# Altium PCB comm-rfb(1).PcbDoc
Units mm, origin at the board's own origin, x right, y up, seen from the top; angles counter-clockwise.
Board outline 90.17 x 95.88 mm, 4 copper layers (F.Cu, In1.Cu, In2.Cu, B.Cu); 61 components, 214 nets, 404 pads, 150 vias.
Unrouted connection lines stored in the file: 5.
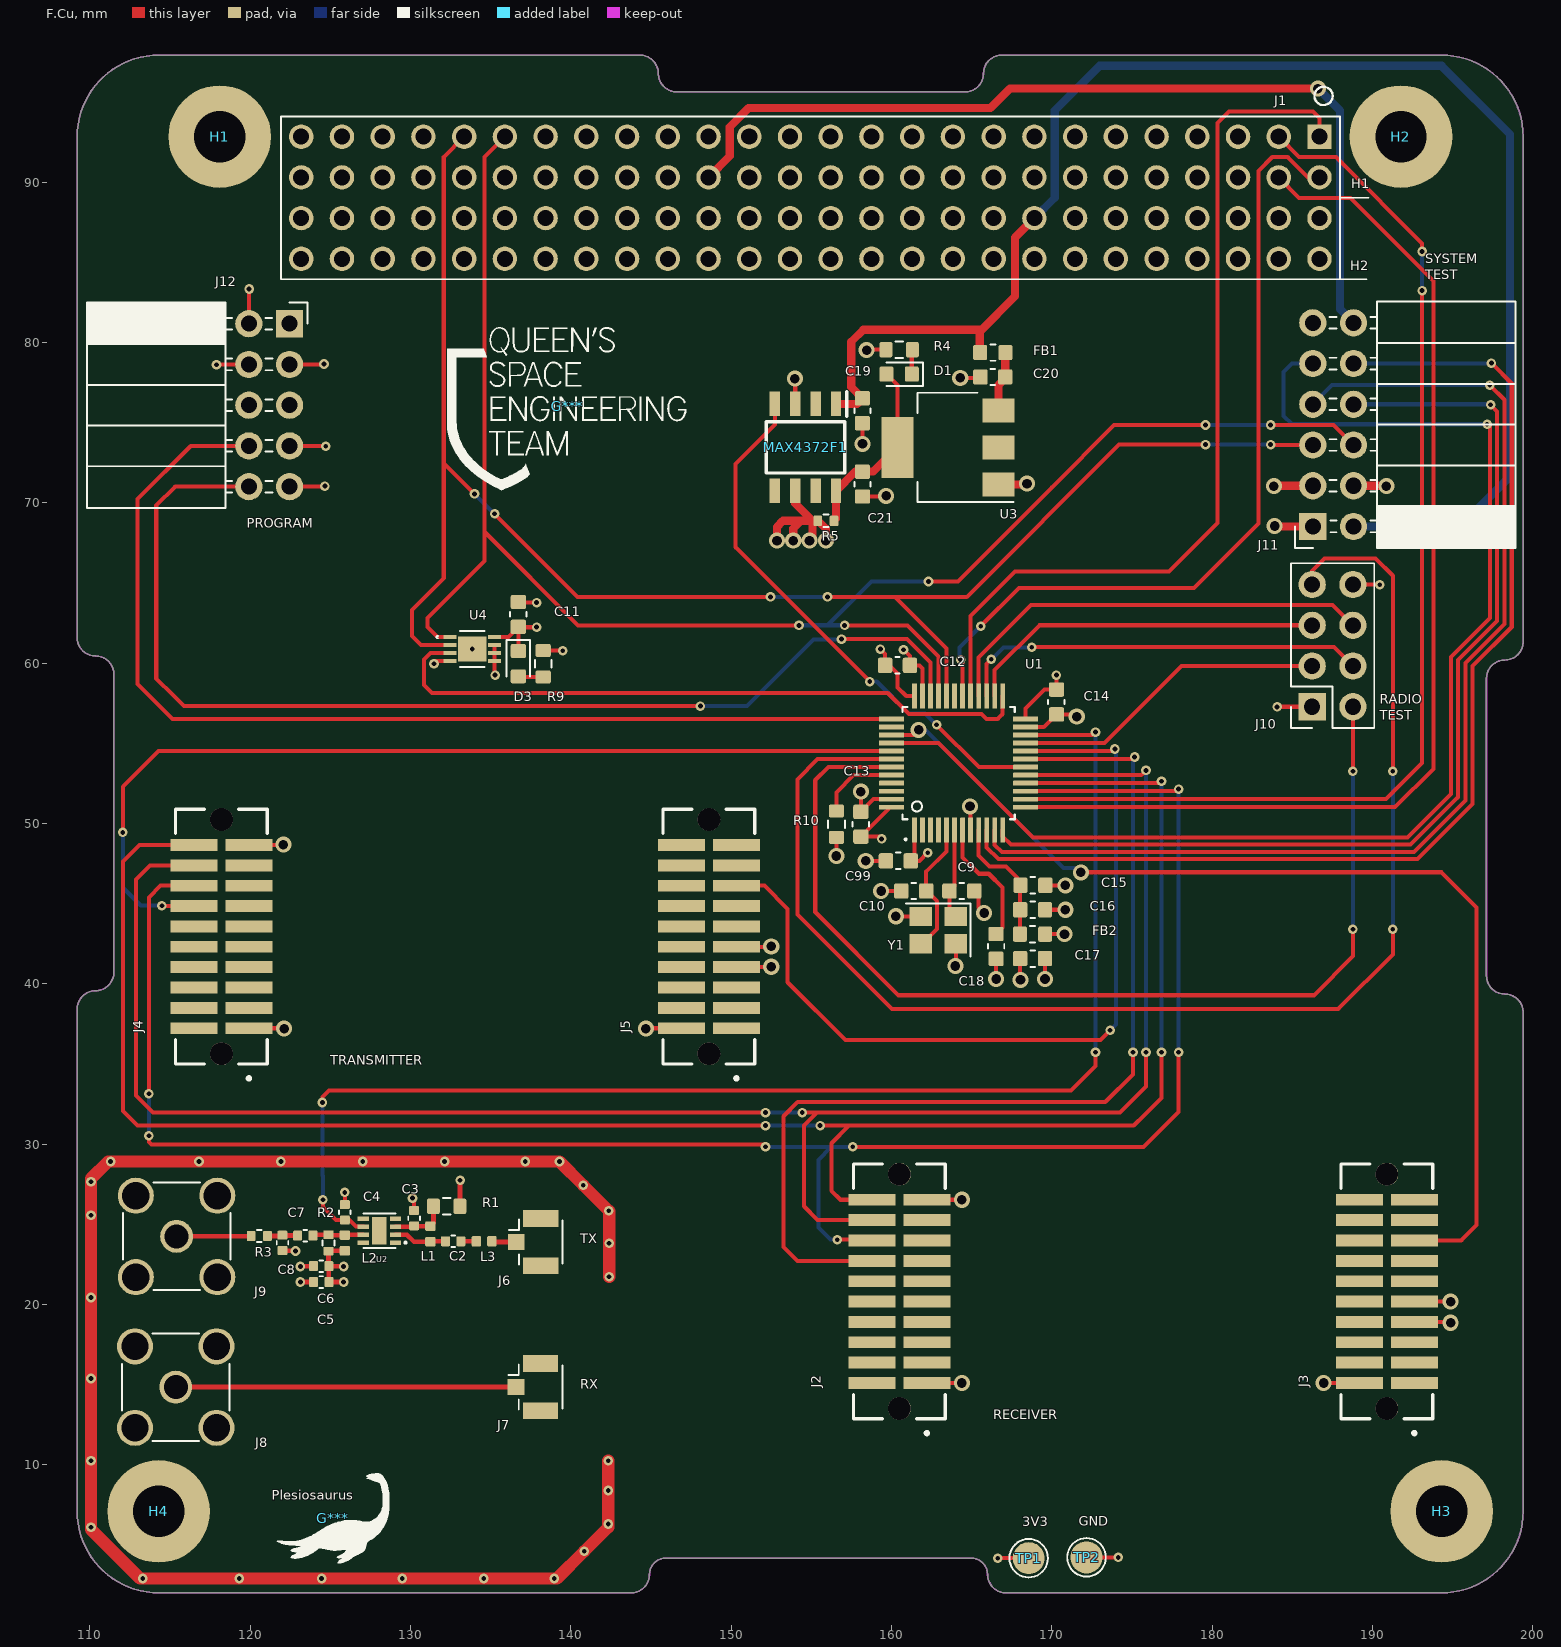
[diagram p0: F.Cu view]
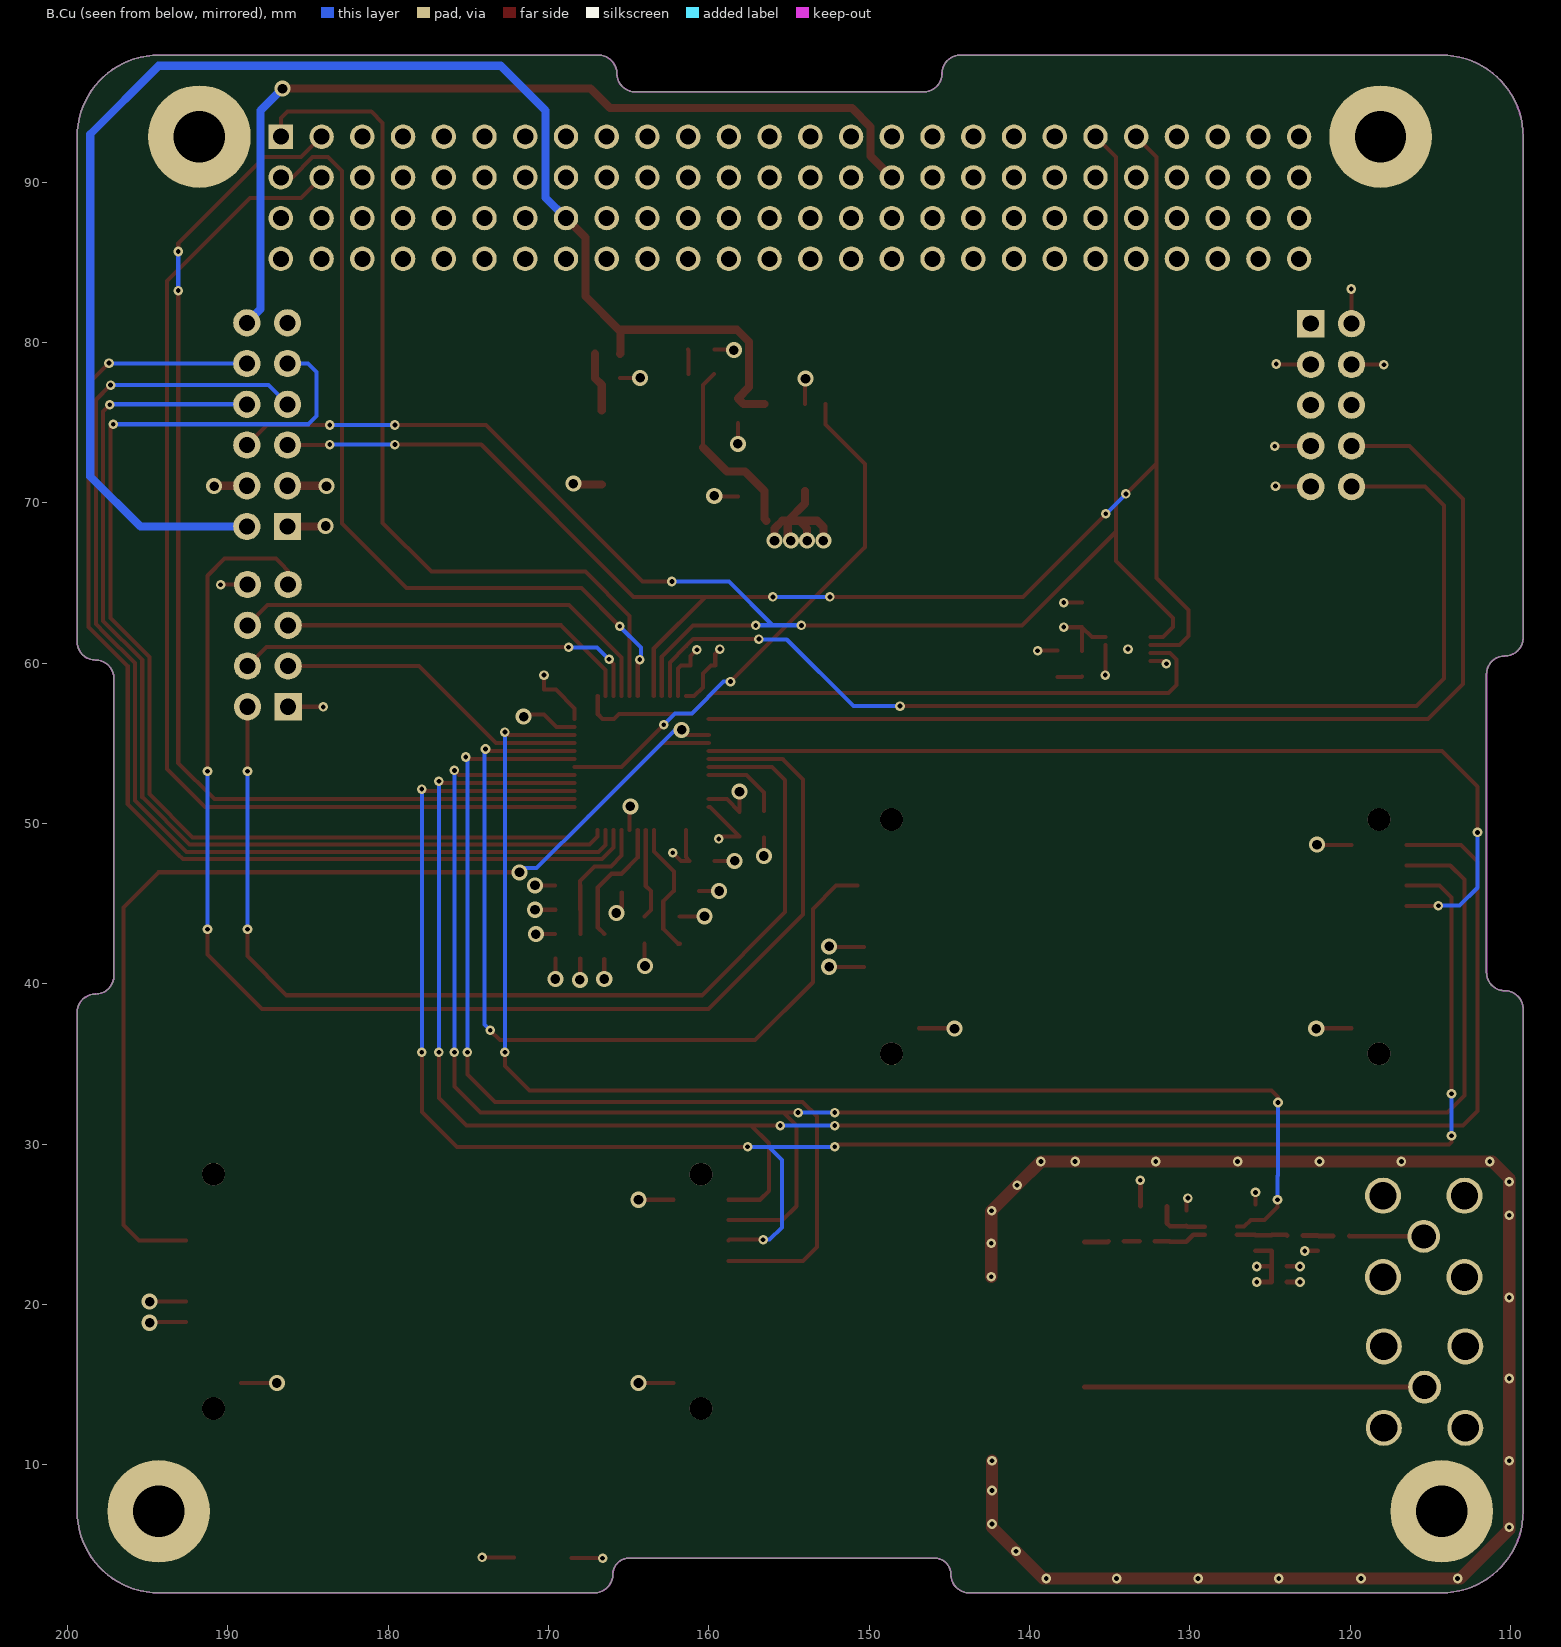
[diagram p1: B.Cu view, seen from below]
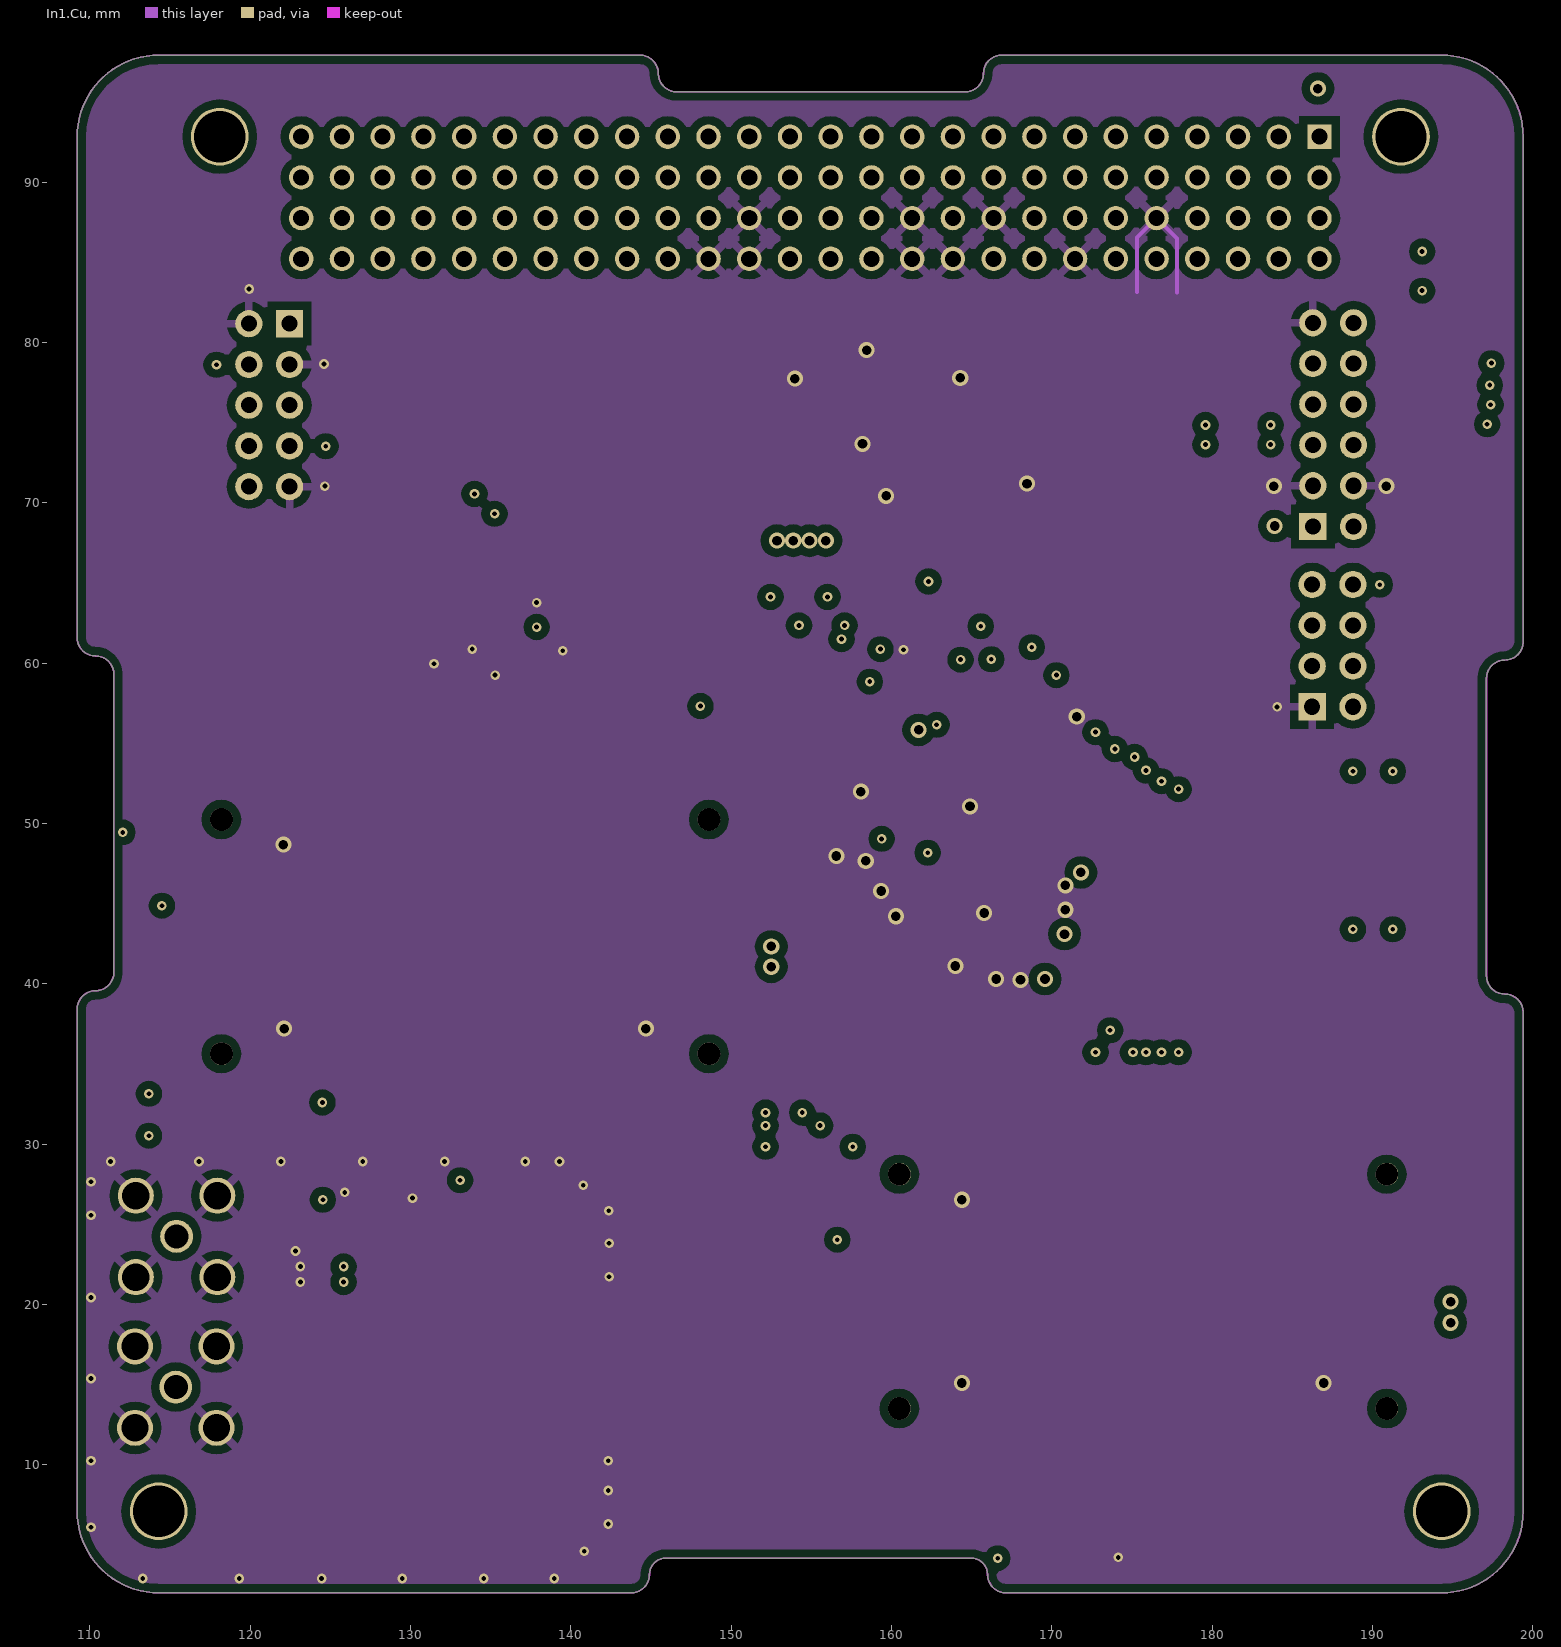
[diagram p2: In1.Cu]
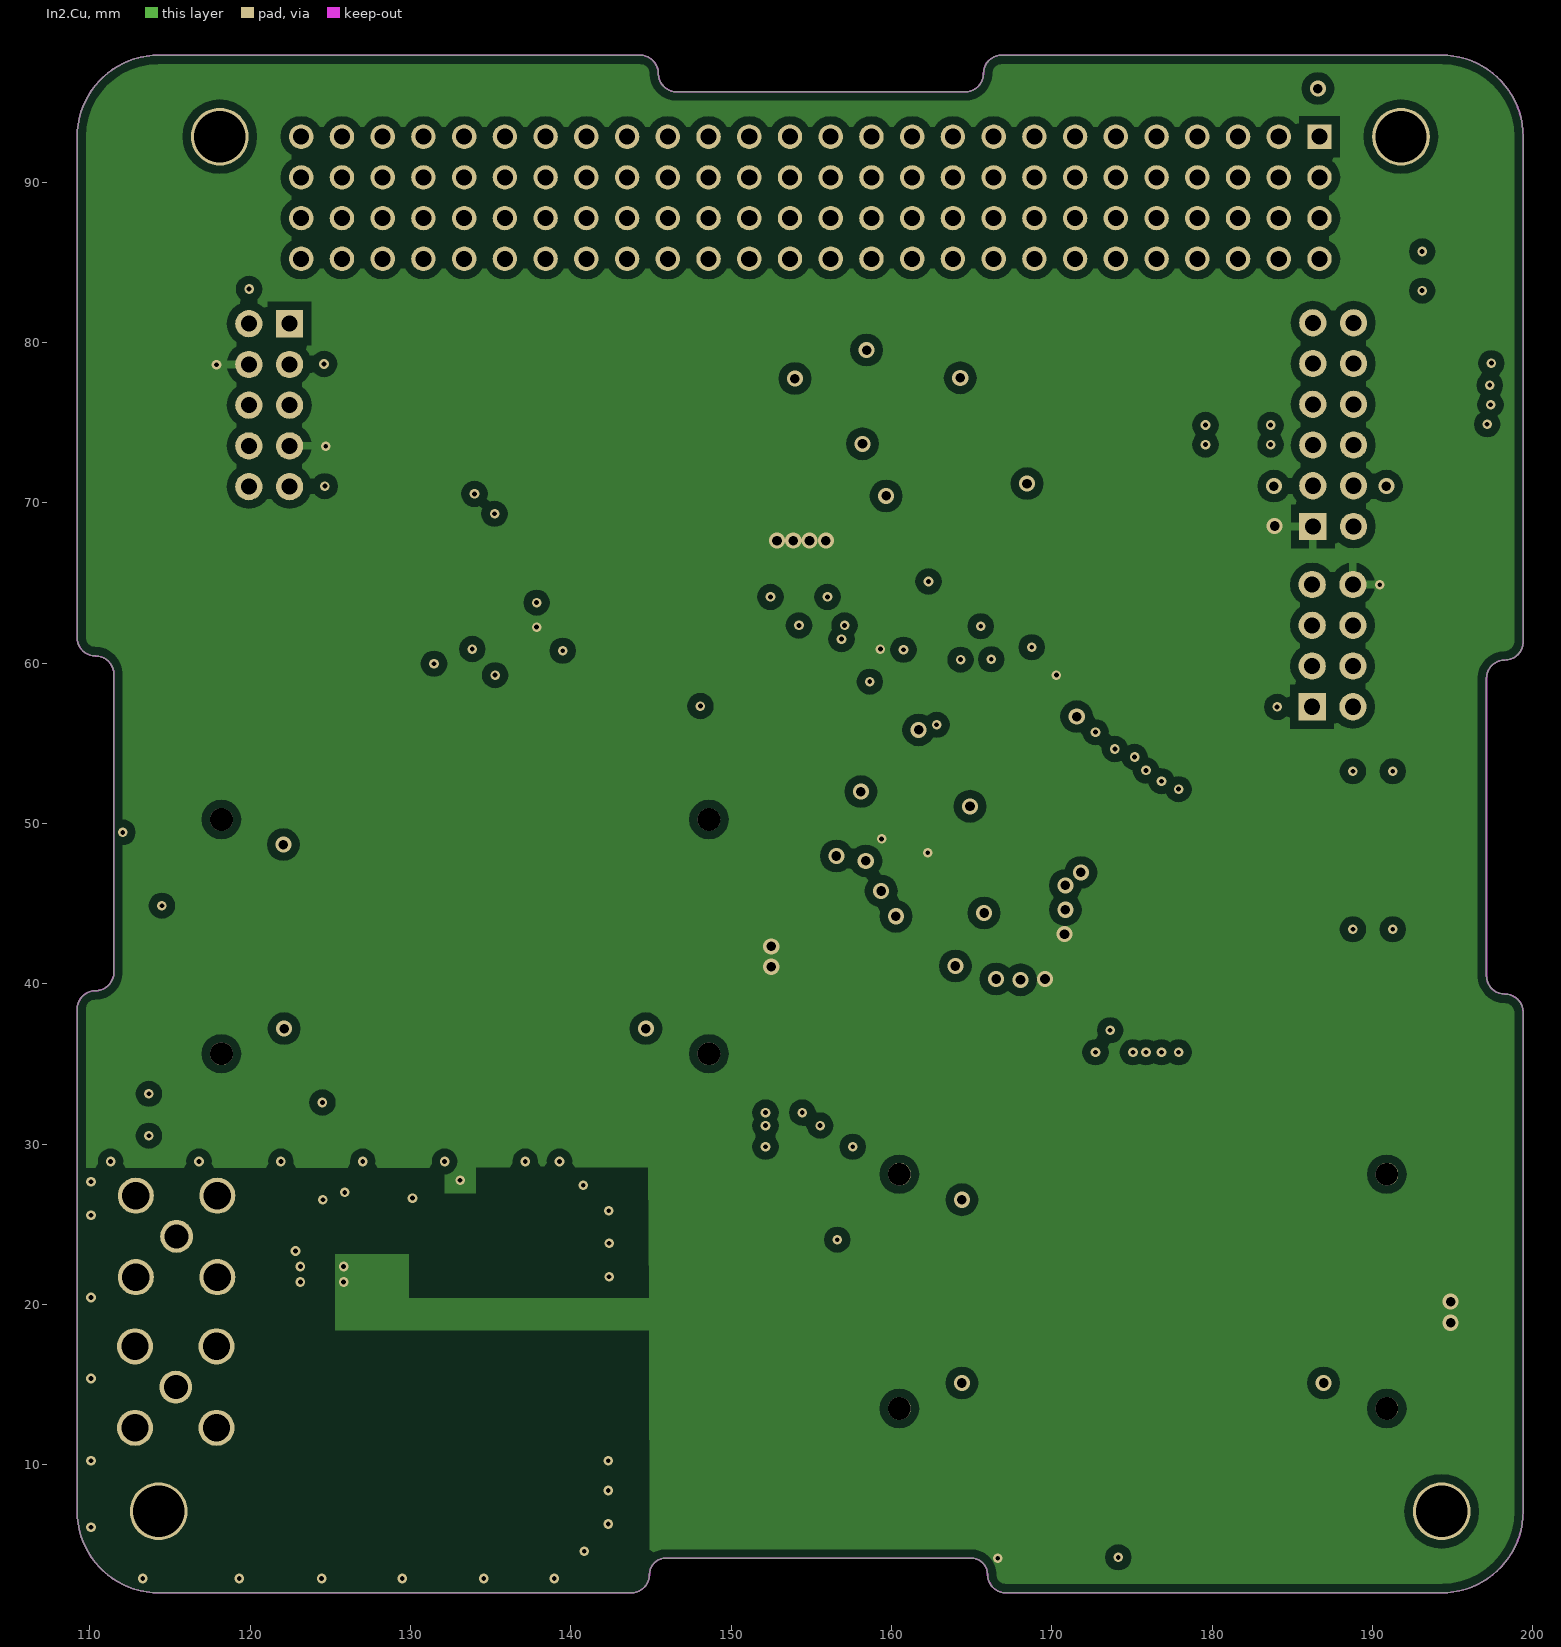
[diagram p3: In2.Cu]

## Layer stack, top to bottom
F.Mask: solder mask 0.0102, Solder Resist, Dk 3.5
F.Cu: signal copper 0.0356
Dielectric 1: dielectric 0.32, FR-4, Dk 4.8
In1.Cu: signal copper 0.0356
Dielectric2: dielectric 0.32, FR-4, Dk 4.8
In2.Cu: signal copper 0.0356
Dielectric3: dielectric 0.32, FR-4, Dk 4.8
B.Cu: signal copper 0.0356
B.Mask: solder mask 0.0102, Solder Resist, Dk 3.5

## Board outline
109.22,61.588 109.22,92.83 cw(c114.3,92.83) 114.3,97.91 144.318,97.91 cw(c144.318,96.767) 145.461,96.767 ccw(c146.604,96.767) 146.604,95.624 164.592,95.624 ccw(c164.592,96.767) 165.735,96.767 cw(c166.878,96.767) 194.31,97.91 cw(c194.31,92.83) 199.39,92.83 199.39,61.334 cw(c198.247,61.334) 198.247,60.191 ccw(c198.247,59.048) 197.104,59.048 197.104,40.506 ccw(c198.247,40.506) 198.247,39.363 cw(c198.247,38.22) 199.39,38.22 199.39,7.105 cw(c194.31,7.105) 194.31,2.025 167.132,2.025 cw(c167.132,3.168) 165.989,3.168 ccw(c164.973,3.168) 164.973,4.184 145.923,4.184 ccw(c145.923,3.168) 144.907,3.168 cw(c143.764,3.168) 143.764,2.025 114.3,2.025 cw(c114.3,7.105) 109.22,7.105 109.22,38.428 cw(c110.363,38.428) 110.363,39.571 ccw(c110.363,40.714) 111.506,40.714 111.506,59.302 ccw(c110.363,59.302) 110.363,60.445 cw(c110.363,61.588) 109.22,61.588

## Design rules (kind name [scope] priority, off if disabled: settings)
Clearance "Clearence 0.508_Polygon" [InNamedPolygon('In1.Cu-GND') OR InNamedPolygon('In2.Cu-+3V3')] p1: gap=0.508 ignorepadtopadclearanceinfootprint=FALSE
MinimumSolderMaskSliver [All] p1: minsoldermaskwidth=0
PolygonConnect Polygon_In2.Cu-+3V3_ConnectDirect [IsNamedPolygon('In2.Cu-+3V3') vs IsVia] p1: connectstyle=Direct reliefconductorwidth=0.254 reliefentries=4 polygonreliefangle="90 Angle" airgapwidth=0.254
PolygonConnect Polygon_In2.Cu-+3V3_ConnectRelief45 [IsNamedPolygon('In2.Cu-+3V3') vs (IsThruPin or IsSMTPin) and (PadShape_AllLayers = 'Round')] p2: connectstyle=Relief reliefconductorwidth=0.508 reliefentries=4 polygonreliefangle="45 Angle" airgapwidth=0.508
PolygonConnect Polygon_In2.Cu-+3V3_ConnectRelief90 [IsNamedPolygon('In2.Cu-+3V3') vs (IsThruPin or IsSMTPin) and (PadShape_AllLayers <> 'Round')] p3: connectstyle=Relief reliefconductorwidth=0.508 reliefentries=4 polygonreliefangle="90 Angle" airgapwidth=0.508
PolygonConnect Polygon_In1.Cu-GND_ConnectDirect [IsNamedPolygon('In1.Cu-GND') vs IsVia] p4: connectstyle=Direct reliefconductorwidth=0.254 reliefentries=4 polygonreliefangle="90 Angle" airgapwidth=0.254
PolygonConnect Polygon_In1.Cu-GND_ConnectRelief45 [IsNamedPolygon('In1.Cu-GND') vs (IsThruPin or IsSMTPin) and (PadShape_AllLayers = 'Round')] p5: connectstyle=Relief reliefconductorwidth=0.508 reliefentries=4 polygonreliefangle="45 Angle" airgapwidth=0.508
PolygonConnect Polygon_In1.Cu-GND_ConnectRelief90 [IsNamedPolygon('In1.Cu-GND') vs (IsThruPin or IsSMTPin) and (PadShape_AllLayers <> 'Round')] p6: connectstyle=Relief reliefconductorwidth=0.508 reliefentries=4 polygonreliefangle="90 Angle" airgapwidth=0.508
RoutingVias [All] p1: holewidth=0.711 width=1.27 viastyle="Through Hole" minholewidth=0.711 minwidth=1.27 maxholewidth=0.711 maxwidth=1.27
SilkToSilkClearance [All] p1: silktosilkclearance=0
SilkToSolderMaskClearance [IsPad] p1: minsilkscreentomaskgap=0 clearancetoexposedcopper=TRUE
SolderMaskExpansion [All] p1: expansion=0.102 istentingtop=FALSE
Width [All] p1: maxlimit=10 minlimit=0.254 preferedwidth=0.254 minimp=50.000000 maximp=50.000000 favimp=50.000000
27 further rules are at their usual default settings.

## Components (designator, comment, footprint, x,y, rotation, side; value= is the part's Value field where it differs from the comment)
C2 "20p" C_0402_1005Metric 132.667,23.945 r180 top
C3 "1000p" C_0402_1005Metric 130.226,25.393 r90 top
C4 "1000p" C_0402_1005Metric 125.908,25.749 r90 top
C5 "1000p" C_0402_1005Metric 124.435,21.405 r180 top
C6 "10p" C_0402_1005Metric 124.435,22.396 r180 top
C7 "10p" C_0402_1005Metric 123.444,24.301 r180 top
C8 "1p8" C_0402_1005Metric 122.022,23.844 r270 top
C9 "10p" C_0603_1608Metric 164.389,45.789 r0 top
C10 "10p" C_0603_1608Metric 161.392,45.789 r180 top
C11 "0.1uF" C_0603_1608Metric 136.728,63.036 r90 top
C12 "100n" C_0603_1608Metric 160.376,59.861 r0 top
C13 "100n" C_0603_1608Metric 158.09,49.955 r90 top
C14 "100n" C_0603_1608Metric 170.282,57.575 r270 top
C15 "10n" C_0603_1608Metric 168.821,46.145 r0 top
C16 "1u" C_0603_1608Metric 168.796,44.621 r0 top
C17 "1u" C_0603_1608Metric 168.796,41.573 r180 top
C18 "100u" C_0603_1608Metric 166.522,42.335 r270 top
C19 "100n" C_0603_1608Metric 158.191,75.736 r270 top
C20 "22u" C_0603_1608Metric 166.319,77.844 r180 top
C21 "22u" C_0603_1608Metric 158.191,71.164 r270 top
C99 "100n" C_0603_1608Metric 160.426,47.669 r180 top
D1 "LED" LED_0603_1608Metric 160.477,78.022 r180 top
D3 "RED" D_0603_1608Metric 136.728,59.962 r270 top
FB1 "100R @ 100 MHz" L_0603_1608Metric 166.319,79.368 r180 top
FB2 "100R @ 100MHz" L_0603_1608Metric 168.796,43.097 r0 top
G*** "LOGO" LOGO 125.171,6.673 r0 top
G*** "LOGO" LOGO 139.791,76.009 r0 top
H1 "MountingHole_Pad" MountingHole_3.2mm_M3_Pad_TopBottom 118.11,92.83 r0 top
H2 "MountingHole_Pad" MountingHole_3.2mm_M3_Pad_TopBottom 191.77,92.83 r0 top
H3 "MountingHole_Pad" MountingHole_3.2mm_M3_Pad_TopBottom 194.31,7.105 r0 top
H4 "MountingHole_Pad" MountingHole_3.2mm_M3_Pad_TopBottom 114.3,7.105 r0 top
J1 "PC104_Connector" pc104-connector 156.21,90.29 r270 top
J2 "TFM-110-02-SM-D-A-K-TR" SAMTEC_TFM-110-02-SM-D-A-K-TR#1 160.489,20.821 r90 top
J3 "TFM-110-02-SM-D-A-K-TR" SAMTEC_TFM-110-02-SM-D-A-K-TR#2 190.89,20.821 r90 top
J4 "TFM-110-02-SM-D-A-K-TR" SAMTEC_TFM-110-02-SM-D-A-K-TR#1 118.212,42.944 r90 top
J5 "TFM-110-02-SM-D-A-K-TR" SAMTEC_TFM-110-02-SM-D-A-K-TR#1 148.615,42.944 r90 top
J6 "Conn_Coaxial" U.FL_Hirose_U.FL-R-SMT-1_Vertical 137.645,23.894 r0 top
J7 "Conn_Coaxial" U.FL_Hirose_U.FL-R-SMT-1_Vertical 137.64,14.852 r0 top
J8 "Conn_Coaxial" SMA_Amphenol_132134-11_Vertical 115.367,14.852 r0 top
J9 "Conn_Coaxial" SMA_Amphenol_132134-11_Vertical 115.418,24.25 r0 top
J10 "Radio Test Connector" PinSocket_2x04_P2.54mm_Vertical 186.233,57.28 r180 top
J11 "System Test Connector" PinSocket_2x06_P2.54mm_Horizontal 186.272,68.522 r180 top
J12 "Programming Header" PinSocket_2x05_P2.54mm_Horizontal 122.465,81.166 r0 top
L1 "150n" L_0402_1005Metric 131.242,24.402 r90 top
L2 "22n" L_0402_1005Metric 125.908,23.844 r90 top
L3 "12n" L_0402_1005Metric 134.597,23.945 r180 top
MAX4372F1 "MAX4372FESA+" SOIC127P600X175-8N 154.635,73.45 r270 top
R1 "9.1k" R_0603_1608Metric 132.26,26.13 r180 top
R2 "330" R_0402_1005Metric 124.892,23.844 r90 top
R3 "15" R_0402_1005Metric 120.574,24.275 r180 top
R4 "1k5" R_0603_1608Metric 160.477,79.546 r0 top
R5 "100m" R_0402_1005Metric 155.905,68.878 r180 top
R9 "2.2k" R_0603_1608Metric 138.278,59.962 r90 top
R10 "10k" R_0603_1608Metric 156.566,49.955 r270 top
TP1 "3V3" TestPoint_Pad_D2.0mm 168.554,4.184 r180 top
TP2 "GND" TestPoint_Pad_D2.0mm 172.161,4.235 r180 top
U1 "STM32F030CCT6" QFP50P900X900X160-48N 164.186,53.765 r90 top
U2 "SKY67150-396LF" SON50P200X200X80-9N 128.067,24.606 r180 top
U3 "AMS1117-3.3" SOT-223-3_TabPin2 163.525,73.45 r180 top
U4 "MCP9808T-E/MC" MCP9808T-E&slash_MC 133.858,60.877 r0 top
Y1 "16 MHz" Crystal_SMD_3225-4Pin_3.2x2.5mm 162.916,43.351 r180 top

## Footprints (in the part's own frame and the unit in brackets; to place one, negate y for a bottom-side part, rotate by r counter-clockwise, add the part's x,y. Pads: shape width x height; smd on the part's side, far side on the other; paste and mask are expansions set on the pad)
C_0402_1005Metric [mm]
  rrect25% 0.56x0.62 smd mask+0: 1(-0.48,0) 2(0.48,0)
  silkscreen extent -0.11,-0.36 0.11,0.36
C_0603_1608Metric [mm]
  rrect25% 0.9x0.95 smd mask+0: 1(-0.775,0) 2(0.775,0)
  silkscreen extent -0.14,-0.51 0.14,0.51
Crystal_SMD_3225-4Pin_3.2x2.5mm [mm]
  rect 1.4x1.2 smd mask+0: 1(-1.1,-0.85) 2(1.1,-0.85) 3(1.1,0.85) 4(-1.1,0.85)
  silkscreen extent -2,-1.65 2,1.65
D_0603_1608Metric [mm]
  rrect25% 0.875x0.95 smd mask+0: 1(-0.787,0) 2(0.787,0)
  silkscreen extent -1.49,-0.73 0.8,0.73
L_0402_1005Metric [mm]
  rrect25% 0.59x0.64 smd mask+0: 1(-0.485,0) 2(0.485,0)
L_0603_1608Metric [mm]
  rrect25% 0.875x0.95 smd mask+0: 1(-0.787,0) 2(0.787,0)
  silkscreen extent -0.16,-0.51 0.16,0.51
LED_0603_1608Metric [mm]
  rrect25% 0.875x0.95 smd mask+0: 1(-0.787,0) 2(0.787,0)
  silkscreen extent -1.49,-0.73 0.8,0.73
LOGO [mm]
  silkscreen extent -3.51,-2.82 3.51,2.81
MCP9808T-E&slash_MC [mil]
  rect 32x10 smd mask+0: 1(-55,29.53) 2(-55,9.84) 3(-55,-9.84) 4(-55,-29.53) 5(55,-29.53) 6(55,-9.84) 7(55,9.84) 8(55,29.53)
  rect 69x61 smd mask+0: 9(0,0)
  silkscreen extent -88,-44 31,44
MountingHole_3.2mm_M3_Pad_TopBottom [mm]
  round 6.4 smd paste-6.4 mask+0: 1(0,0)
  round 6.4 smd far side paste-6.4 mask+0: 1(0,0)
  round 3.6 hole 3.2 paste-2539.97 mask+0: 1(0,0)
pc104-connector [mil]
  rect 60x60 hole 39.37 paste-99999 mask+0: 1(-100,1200)
  round 60 hole 39.37 paste-99999 mask+0: 2(0,1200) 3(-100,1100) 4(0,1100) 5(-100,1000) 6(0,1000) 7(-100,900) 8(0,900) 9(-100,800) 10(0,800) 11(-100,700) 12(0,700) 13(-100,600) 14(0,600) 15(-100,500) 16(0,500) 17(-100,400) 18(0,400) 19(-100,300) 20(0,300) 21(-100,200) 22(0,200) 23(-100,100) 24(0,100) 25(-100,0) 26(0,0) 27(-100,-100) 28(0,-100) 29(-100,-200) 30(0,-200) 31(-100,-300) 32(0,-300) 33(-100,-400) 34(0,-400) 35(-100,-500) 36(0,-500) 37(-100,-600) 38(0,-600) 39(-100,-700) 40(0,-700) 41(-100,-800) 42(0,-800) 43(-100,-900) 44(0,-900) 45(-100,-1000) 46(0,-1000) 47(-100,-1100) 48(0,-1100) 49(-100,-1200) 50(0,-1200) 51(-100,-1300) 52(0,-1300) 53(100,1200) 54(200,1200) 55(100,1100) 56(200,1100) 57(100,1000) 58(200,1000) 59(100,900) 60(200,900) 61(100,800) 62(200,800) 63(100,700) 64(200,700) 65(100,600) 66(200,600) 67(100,500) 68(200,500) 69(100,400) 70(200,400) 71(100,300) 72(200,300) 73(100,200) 74(200,200) 75(100,100) 76(200,100) 77(100,0) 78(200,0) 79(100,-100) 80(200,-100) 81(100,-200) 82(200,-200) 83(100,-300) 84(200,-300) 85(100,-400) 86(200,-400) 87(100,-500) 88(200,-500) 89(100,-600) 90(200,-600) 91(100,-700) 92(200,-700) 93(100,-800) 94(200,-800) 95(100,-900) 96(200,-900) 97(100,-1000) 98(200,-1000) 99(100,-1100) 100(200,-1100) 101(100,-1200) 102(200,-1200) 103(100,-1300) 104(200,-1300)
  silkscreen extent -150,-1350 250,1320
PinSocket_2x04_P2.54mm_Vertical [mm]
  rect 1.7x1.7 hole 1 paste-2539.97 mask+0: 1(0,0)
  rrect100% 1.7x1.7 hole 1 paste-2539.97 mask+0: 2(-2.54,0) 3(0,-2.54) 4(-2.54,-2.54) 5(0,-5.08) 6(-2.54,-5.08) 7(0,-7.62) 8(-2.54,-7.62)
  silkscreen extent -3.87,-8.95 1.33,1.33
PinSocket_2x05_P2.54mm_Horizontal [mm]
  rect 1.7x1.7 hole 1 paste-2539.97 mask+0: 1(0,0)
  rrect100% 1.7x1.7 hole 1 paste-2539.97 mask+0: 2(-2.54,0) 3(0,-2.54) 4(-2.54,-2.54) 5(0,-5.08) 6(-2.54,-5.08) 7(0,-7.62) 8(-2.54,-7.62) 9(0,-10.16) 10(-2.54,-10.16)
  silkscreen extent -12.63,-11.49 1.11,1.33
PinSocket_2x06_P2.54mm_Horizontal [mm]
  rect 1.7x1.7 hole 1 paste-2539.97 mask+0: 1(0,0)
  rrect100% 1.7x1.7 hole 1 paste-2539.97 mask+0: 2(-2.54,0) 3(0,-2.54) 4(-2.54,-2.54) 5(0,-5.08) 6(-2.54,-5.08) 7(0,-7.62) 8(-2.54,-7.62) 9(0,-10.16) 10(-2.54,-10.16) 11(0,-12.7) 12(-2.54,-12.7)
  silkscreen extent -12.63,-14.03 1.11,1.33
QFP50P900X900X160-48N [mm]
  rrect11% 1.56x0.3 smd mask+0: 1(-4.18,2.75) 2(-4.18,2.25) 3(-4.18,1.75) 4(-4.18,1.25) 5(-4.18,0.75) 6(-4.18,0.25) 7(-4.18,-0.25) 8(-4.18,-0.75) 9(-4.18,-1.25) 10(-4.18,-1.75) 11(-4.18,-2.25) 12(-4.18,-2.75) 25(4.18,-2.75) 26(4.18,-2.25) 27(4.18,-1.75) 28(4.18,-1.25) 29(4.18,-0.75) 30(4.18,-0.25) 31(4.18,0.25) 32(4.18,0.75) 33(4.18,1.25) 34(4.18,1.75) 35(4.18,2.25) 36(4.18,2.75)
  rrect11% 0.3x1.56 smd mask+0: 13(-2.75,-4.18) 14(-2.25,-4.18) 15(-1.75,-4.18) 16(-1.25,-4.18) 17(-0.75,-4.18) 18(-0.25,-4.18) 19(0.25,-4.18) 20(0.75,-4.18) 21(1.25,-4.18) 22(1.75,-4.18) 23(2.25,-4.18) 24(2.75,-4.18) 37(2.75,4.18) 38(2.25,4.18) 39(1.75,4.18) 40(1.25,4.18) 41(0.75,4.18) 42(0.25,4.18) 43(-0.25,4.18) 44(-0.75,4.18) 45(-1.25,4.18) 46(-1.75,4.18) 47(-2.25,4.18) 48(-2.75,4.18)
  silkscreen extent -4.81,-3.5 3.5,3.5
R_0402_1005Metric [mm]
  rrect25% 0.54x0.64 smd mask+0: 1(-0.51,0) 2(0.51,0)
  silkscreen extent -0.15,-0.38 0.15,0.38
R_0603_1608Metric [mm]
  rrect25% 0.8x0.95 smd mask+0: 1(-0.825,0) 2(0.825,0)
  silkscreen extent -0.24,-0.52 0.24,0.52
SAMTEC_TFM-110-02-SM-D-A-K-TR#1 [mm]
  rect 0.74x2.92 smd mask+0: 01(-5.715,-1.715) 02(-5.715,1.715) 03(-4.445,-1.715) 04(-4.445,1.715) 05(-3.175,-1.715) 06(-3.175,1.715) 07(-1.905,-1.715) 08(-1.905,1.715) 09(-0.635,-1.715) 10(-0.635,1.715) 11(0.635,-1.715) 12(0.635,1.715) 13(1.905,-1.715) 14(1.905,1.715) 15(3.175,-1.715) 16(3.175,1.715) 17(4.445,-1.715) 18(4.445,1.715) 19(5.715,-1.715) 20(5.715,1.715)
  round 1.42 hole 1.42 paste-2539.97 mask+0: Un1(-7.305,0) Un2(7.305,0)
  silkscreen extent -8.94,-2.86 7.94,2.86
SAMTEC_TFM-110-02-SM-D-A-K-TR#2 [mm]
  rect 0.74x2.92 smd mask+0: 01(-5.715,-1.715) 02(-5.715,1.715) 03(-4.445,-1.715) 04(-4.445,1.715) 05(-3.175,-1.715) 06(-3.175,1.715) 07(-1.905,-1.715) 08(-1.905,1.715) 09(-0.635,-1.715) 10(-0.635,1.715) 11(0.635,-1.715) 12(0.635,1.715) 13(1.905,-1.715) 14(1.905,1.715) 15(3.175,-1.715) 16(3.175,1.715) 17(4.445,-1.715) 18(4.445,1.715) 19(5.715,-1.715) 20(5.715,1.715)
  round 1.42 hole 1.42 paste-2539.97 mask+0: Un1(7.305,0) Un2(-7.305,0)
  silkscreen extent -8.94,-2.86 7.94,2.86
SMA_Amphenol_132134-11_Vertical [mm]
  round 2.05 hole 1.5 paste-2539.97 mask+0: 1(0,0)
  round 2.25 hole 1.7 paste-2539.97 mask+0: 2(-2.54,-2.54) 2(-2.54,2.54) 2(2.54,-2.54) 2(2.54,2.54)
  silkscreen extent -3.35,-3.35 3.35,3.35
SOIC127P600X175-8N [mm]
  rect 1.525x0.65 smd mask+0: 1(-2.712,1.905) 2(-2.712,0.635) 3(-2.712,-0.635) 4(-2.712,-1.905) 5(2.712,-1.905) 6(2.712,-0.635) 7(2.712,0.635) 8(2.712,1.905)
  silkscreen extent -3.47,-2.45 1.6,2.58
SON50P200X200X80-9N [mm]
  rrect3% 0.71x0.26 smd mask+0: 1(-1.005,0.75) 2(-1.005,0.25) 3(-1.005,-0.25) 4(-1.005,-0.75) 5(1.005,-0.75) 6(1.005,-0.25) 7(1.005,0.25) 8(1.005,0.75)
  rect 0.9x1.7 smd paste-1.7 mask+0: 9(0,0)
  silkscreen extent -1.67,-1.07 1,1.07
SOT-223-3_TabPin2 [mm]
  rect 2x1.5 smd mask+0: 1(-3.15,2.3) 2(-3.15,0) 3(-3.15,-2.3)
  rect 2x3.8 smd mask+0: 2(3.15,0)
  silkscreen extent -4.1,-3.41 1.91,3.41
TestPoint_Pad_D2.0mm [mm]
  round 2 smd paste-2 mask+0: 1(0,0)
  silkscreen extent -1.2,-1.2 1.2,1.2
U.FL_Hirose_U.FL-R-SMT-1_Vertical [mm]
  rect 1.05x1 smd mask+0: 1(-1.05,0)
  rect 2.2x1.05 smd mask+0: 2(0.475,-1.475) 2(0.475,1.475)
  silkscreen extent -1.52,-1.4 1.84,1.4

## Part data
C2 C3 C4 C5 C6 C7 C8: library part C_0402_1005Metric, "Capacitor SMD 0402 (1005 Metric), square (rectangular) end terminal, IPC_7351 nominal, (Body size source: IPC-SM-782 page 76, https://www.pcb-3d.com/wordpress/wp-content/uploads/ipc-sm-782a_amendment_1_and_2.pdf), generated with kicad-footprint-generator", Sheetfile=rffrontend.kicad_sch, Sheetname="RF Front End (Tx & Rx)"
C9 C10 C11 C12 C13 C14 C15 C16 C17 C18 C19 C20 C21 C99: library part C_0603_1608Metric, "Capacitor SMD 0603 (1608 Metric), square (rectangular) end terminal, IPC_7351 nominal, (Body size source: IPC-SM-782 page 76, https://www.pcb-3d.com/wordpress/wp-content/uploads/ipc-sm-782a_amendment_1_and_2.pdf), generated with kicad-footprint-generator"
  C9 C10 C12 C13 C14 C15 C16 C17 C18 C99: Sheetfile=comm-rfb.kicad_sch
  C11: Sheetfile=temperaturesensor.kicad_sch, Sheetname="Temperature Sensor"
  C19 C20 C21: Sheetfile=voltageconverter.kicad_sch, Sheetname="Voltage Generation and Measurement"
D1: library part LED_0603_1608Metric, "LED SMD 0603 (1608 Metric), square (rectangular) end terminal, IPC_7351 nominal, (Body size source: http://www.tortai-tech.com/upload/download/2011102023233369053.pdf), generated with kicad-footprint-generator", Sheetfile=voltageconverter.kicad_sch, Sheetname="Voltage Generation and Measurement"
D3: library part D_0603_1608Metric, "Diode SMD 0603 (1608 Metric), square (rectangular) end terminal, IPC_7351 nominal, (Body size source: http://www.tortai-tech.com/upload/download/2011102023233369053.pdf), generated with kicad-footprint-generator", Sheetfile=temperaturesensor.kicad_sch, Sheetname="Temperature Sensor", Spice_Netlist_Enabled=Y, Spice_Primitive=D
FB1 FB2: library part L_0603_1608Metric, "Inductor SMD 0603 (1608 Metric), square (rectangular) end terminal, IPC_7351 nominal, (Body size source: http://www.tortai-tech.com/upload/download/2011102023233369053.pdf), generated with kicad-footprint-generator"
  FB1: Sheetfile=voltageconverter.kicad_sch, Sheetname="Voltage Generation and Measurement"
  FB2: Sheetfile=comm-rfb.kicad_sch
H1 H2 H3 H4: library part MountingHole_3.2mm_M3_Pad_TopBottom, "Mounting Hole 3.2mm, M3", Sheetfile=comm-rfb.kicad_sch
J1: library part pc104-connector, Sheetfile=comm-rfb.kicad_sch
J2 J3 J4 J5: library part SAMTEC_TFM-110-02-SM-D-A-K-TR, MANUFACTURER=Samtec, PARTREV=R, STANDARD="Manufacturer Recommendations", Sheetfile=radioevaluationboardconnectors.kicad_sch, Sheetname="Radio Evaluation Board Connectors"
J6 J7: library part U.FL_Hirose_U.FL-R-SMT-1_Vertical, "Hirose U.FL Coaxial https://www.hirose.com/product/en/products/U.FL/U.FL-R-SMT-1%2810%29/", Sheetfile=rffrontend.kicad_sch, Sheetname="RF Front End (Tx & Rx)"
J8 J9: library part SMA_Amphenol_132134-11_Vertical, "https://www.amphenolrf.com/downloads/dl/file/id/3406/product/2975/132134_11_customer_drawing.pdf", Sheetfile=rffrontend.kicad_sch, Sheetname="RF Front End (Tx & Rx)"
J10: library part PinSocket_2x04_P2.54mm_Vertical, "Through hole straight socket strip, 2x04, 2.54mm pitch, double cols (from Kicad 4.0.7), script generated", Sheetfile=testconnectors.kicad_sch, Sheetname="Test and Programming Connectors"
J11: library part PinSocket_2x06_P2.54mm_Horizontal, "Through hole angled socket strip, 2x06, 2.54mm pitch, 8.51mm socket length, double cols (from Kicad 4.0.7), script generated", Sheetfile=testconnectors.kicad_sch, Sheetname="Test and Programming Connectors"
J12: library part PinSocket_2x05_P2.54mm_Horizontal, "Through hole angled socket strip, 2x05, 2.54mm pitch, 8.51mm socket length, double cols (from Kicad 4.0.7), script generated", Sheetfile=testconnectors.kicad_sch, Sheetname="Test and Programming Connectors"
L1 L2 L3: library part L_0402_1005Metric, "Inductor SMD 0402 (1005 Metric), square (rectangular) end terminal, IPC_7351 nominal, (Body size source: http://www.tortai-tech.com/upload/download/2011102023233369053.pdf), generated with kicad-footprint-generator", Sheetfile=rffrontend.kicad_sch, Sheetname="RF Front End (Tx & Rx)"
MAX4372F1: library part SOIC127P600X175-8N, "S8+2", Sheetfile=voltageconverter.kicad_sch, Sheetname="Voltage Generation and Measurement"
R1 R4 R9 R10: library part R_0603_1608Metric, "Resistor SMD 0603 (1608 Metric), square (rectangular) end terminal, IPC_7351 nominal, (Body size source: IPC-SM-782 page 72, https://www.pcb-3d.com/wordpress/wp-content/uploads/ipc-sm-782a_amendment_1_and_2.pdf), generated with kicad-footprint-generator"
  R1: Sheetfile=rffrontend.kicad_sch, Sheetname="RF Front End (Tx & Rx)"
  R4: Sheetfile=voltageconverter.kicad_sch, Sheetname="Voltage Generation and Measurement"
  R9: Sheetfile=temperaturesensor.kicad_sch, Sheetname="Temperature Sensor"
  R10: Sheetfile=comm-rfb.kicad_sch
R2 R3 R5: library part R_0402_1005Metric, "Resistor SMD 0402 (1005 Metric), square (rectangular) end terminal, IPC_7351 nominal, (Body size source: IPC-SM-782 page 72, https://www.pcb-3d.com/wordpress/wp-content/uploads/ipc-sm-782a_amendment_1_and_2.pdf), generated with kicad-footprint-generator"
  R2 R3: Sheetfile=rffrontend.kicad_sch, Sheetname="RF Front End (Tx & Rx)"
  R5: Sheetfile=voltageconverter.kicad_sch, Sheetname="Voltage Generation and Measurement"
TP1 TP2: library part TestPoint_Pad_D2.0mm, "SMD pad as test Point, diameter 2.0mm", Sheetfile=comm-rfb.kicad_sch
U1: library part QFP50P900X900X160-48N, MANUFACTURER=STMicroelectronics, Sheetfile=comm-rfb.kicad_sch
U2: library part SON50P200X200X80-9N, MANUFACTURER=Skyworks, PARTREV="May 3,2017", SNAPEDA_PACKAE_ID=8744, STANDARD=IPC-7351B, Sheetfile=rffrontend.kicad_sch, Sheetname="RF Front End (Tx & Rx)"
U3: library part SOT-223-3_TabPin2, "module CMS SOT223 4 pins", Sheetfile=voltageconverter.kicad_sch, Sheetname="Voltage Generation and Measurement"
U4: library part MCP9808T-E&slash_MC, Sheetfile=temperaturesensor.kicad_sch, Sheetname="Temperature Sensor"
Y1: library part Crystal_SMD_3225-4Pin_3.2x2.5mm, "SMD Crystal SERIES SMD3225/4 http://www.txccrystal.com/images/pdf/7m-accuracy.pdf, 3.2x2.5mm^2 package", Sheetfile=comm-rfb.kicad_sch

## Via types
v1: diameter 0.6, hole 0.3, F.Cu to B.Cu, tented both sides, 109 vias
v2: diameter 1, hole 0.6, F.Cu to B.Cu, tented both sides, 41 vias

## Nets (pads, with @x,y where several pads share a name; then routed paths per layer and width w, separated by ;. In a path a pad name is that pad's centre, name@x,y a point inside that pad or via, vN(x,y) a via of type N, cw(c..) or ccw(c..) an arc to the next point about the centre after c; other vN are vias at no path point)
5V0-CHG: J1.32 J11.12 | length 56.9
  F.Cu w0.508: J1.32 149.914,91.614 149.914,93.443 151.079,94.608 166.167,94.608 167.386,95.827 v2(186.589,95.827)
  B.Cu w0.508: v2(186.589,95.827) 187.962,94.454 187.962,82.072 J11.12
+3.3VA: C15.1 C16.1 FB2.1 U1.9 | length 8.2
  F.Cu w0.254: U1.9 165.436,47.994 166.11,47.32 167.132,47.32 168.046,46.405 C15.1 168.021,46.119 C16.1 168.008,44.608 FB2.1
+3V3: C5.1 C6.1 C11.1 C12.1 C13.1 C14.1 C17.1 C99.1 D3.1 FB2.2 J3.07 J3.09 J5.07 J5.09 J10.8 J11.1 J12.4 J12.7 L2.1 MAX4372F1.6 R1.1 R2.1 R5.2 TP1.1 U1.1 U1.24 U1.36 U1.48 U4.8 | length 58.8
  F.Cu w0.254: v1(117.907,78.606) 117.927,78.626 J12.4 ; J12.7 124.694,73.546 v1(124.714,73.526) ; U4.8 136.12,61.627 C11.1@136.728,62.235 ; D3.1 C11.1@136.728,62.235 ; v1(137.871,62.248) 137.858,62.235 C11.1@136.728,62.235 ; J5.07 152.476,41.039 v2(152.502,41.065) ; J5.09 152.476,42.309 v2(152.502,42.335) ; v1(159.309,60.871) 159.601,60.579 C12.1 159.868,59.861 160.376,59.353 160.376,58.489 160.92,57.945 U1.36 ; v1(159.385,49.04) 159.246,49.18 C13.1 159.925,51.015 U1.48 ; U1.1 161.436,47.903 C99.1 161.747,47.669 v1(162.255,48.177) ; v1(166.624,4.184) TP1.1 ; U1.24 168.366,57.183 169.533,58.35 C14.1 v1(170.282,59.251) ; v2(169.57,40.303) C17.1 ; FB2.2 v2(170.79,43.097) ; J10.8 190.439,64.9 v1(190.449,64.89) ; J3.07 194.818,18.916 v2(194.869,18.865) ; J3.09 v2(194.869,20.186)
  F.Cu w0.293: v1(125.832,21.405) C5.1 C6.1 ; v1(125.832,22.37) 125.806,22.396 C6.1 ; L2.1 124.917,23.359 R2.1 124.892,22.419 C6.1 ; R1.1 133.085,27.744 v1(133.096,27.755)
  F.Cu w0.508: v2(152.857,67.633) 152.857,68.497 153.213,68.852 153.238,68.878 155.08,68.878 ; v2(153.873,67.633) 153.873,68.395 153.924,68.446 154.356,68.878 155.08,68.878 ; MAX4372F1.6 154,69.958 155.08,68.878 ; v2(154.889,67.633) 155.08,67.824 155.08,68.878 ; v2(155.905,67.633) 155.905,68.395 155.804,68.497 155.423,68.878 155.08,68.878 ; v2(183.896,68.548) 183.922,68.522 J11.1
/NRST: C18.1 U1.7 | length 8
  F.Cu w0.254: U1.7 164.436,47.876 165.446,46.866 166.065,46.866 166.929,46.002 166.929,43.516 C18.1
AMP-ENABLE: C4.1 U1.22 U2.6 | length 84.2
  F.Cu w0.254: v1(124.511,32.598) 124.511,32.937 124.917,33.343 171.196,33.343 172.72,34.867 v1(172.72,35.731) ; v1(124.538,26.536) 124.538,26.079 125.348,25.269 C4.1 126.206,25.269 126.619,24.856 U2.6 ; U1.22 172.235,55.515 172.54,55.515 v1(172.72,55.695)
  B.Cu w0.254: v1(124.511,32.598) 124.511,28.06 124.538,28.033 v1(124.538,26.536) ; v1(172.72,35.731) 172.72,38.728 172.72,39.642 v1(172.72,55.695)
AMP-TO-EXT: J9.1 R3.2 | length 4.7
  F.Cu w0.293: J9.1 120.038,24.25 R3.2
BOOT0: R10.1 U1.44 | length 5
  F.Cu w0.254: R10.1 156.566,51.936 157.644,53.015 U1.44
COMM-CTS: J1.3 U1.14 | length 69.8
  F.Cu w0.254: U1.14 178.769,51.515 178.929,51.515 190.841,51.515 193.091,53.765 v1(193.091,83.229) ; J1.3 185.421,91.559 187.707,91.559 187.96,91.306 193.091,86.175 v1(193.091,85.667)
  B.Cu w0.254: v1(193.091,83.229) v1(193.091,85.667)
COMM-RTS: J1.4 U1.13 | length 69.2
  F.Cu w0.254: U1.13 191.408,51.015 193.802,53.409 193.802,83.835 188.619,89.019 185.421,89.019 J1.4
COMM-RXD: J1.2 U1.30 | length 51.6
  F.Cu w0.254: v1(164.309,60.216) 164.436,60.09 164.436,59.988 U1.30 ; v1(165.562,62.299) 167.95,64.687 178.867,64.687 182.88,68.7 182.88,90.696 183.744,91.56 184.709,91.56 185.979,90.29 J1.2
  B.Cu w0.254: v1(164.309,60.216) 164.236,60.289 164.236,60.978 164.241,60.978 v1(165.562,62.299)
COMM-TXD: J1.1 U1.29 | length 55.7
  F.Cu w0.254: U1.29 164.936,62.948 167.691,65.703 177.292,65.703 180.34,68.751 180.34,93.694 181.051,94.405 186.284,94.405 186.69,93.998 J1.1
CURR-MONITOR: MAX4372F1.4 U1.18 | length 33.7
  F.Cu w0.254: MAX4372F1.4 152.73,74.872 150.266,72.408 150.266,67.227 v1(158.648,58.845) ; v1(162.814,56.152) 165.452,53.515 U1.18
  B.Cu w0.254: v1(158.648,58.845) 159.08,58.845 161.061,56.864 162.103,56.864 v1(162.814,56.152)
EM-TO-AMP: J6.1 L3.1 | length 1.5
  F.Cu w0.293: L3.1 135.133,23.894 J6.1
GND: C3.2 C4.2 C5.2 C6.2 C8.2 C9.2 C10.2 C11.2 C12.2 C13.2 C14.2 C15.2 C16.2 C17.2 C18.2 C19.2 C20.2 C21.2 C99.2 J1.61 J1.66 J1.69 J1.72 J1.73 J1.74 J1.81 J1.82 J1.84 J2.01 J2.19 J3.02 J4.01 J4.19 J5.02 J6.2 J7.2 J8.2 J9.2 J10.1 J11.3 J11.4 J11.11 J12.2 J12.3 J12.9 MAX4372F1.3 R4.1 R9.2 R10.2 TP2.1 U1.8 U1.23 U1.35 U1.47 U3.1 U4.4 U4.5 U4.6 U4.7 U4.9 Y1.2 Y1.4 | length 181.1
  F.Cu w0.254: J12.2 119.925,83.317 v1(119.939,83.33) ; J4.01 122.098,37.229 v2(122.123,37.204) ; J4.19 122.047,48.659 v2(122.072,48.685) ; J12.9 124.632,71.006 v1(124.663,71.037) ; J12.3 124.582,78.626 v1(124.612,78.657) ; C4.2 125.908,26.991 v1(125.91,26.993) ; v1(130.126,26.638) 130.226,26.538 C3.2 ; v1(131.47,59.962) 131.635,60.127 U4.4 ; U4.7 U4.6 U4.5 135.255,59.277 v1(135.28,59.251) ; C11.2@136.728,63.785 137.858,63.785 v1(137.871,63.772) ; R9.2@138.252,60.787 139.485,60.787 v1(139.497,60.775) ; v2(144.678,37.204) 144.704,37.229 J5.02 ; v2(153.975,77.742) 154,77.717 MAX4372F1.3 ; v2(156.566,47.974) R10.2 ; v2(158.09,51.987) C13.2 158.875,51.515 U1.47 ; C21.2 159.626,70.389 v2(159.664,70.427) ; v2(158.191,73.678) C19.2 ; v2(158.394,47.669) C99.2 ; v2(158.445,79.52) 158.471,79.546 R4.1 ; v2(159.36,45.789) C10.2 ; v2(160.274,44.214) 160.288,44.201 Y1.2 ; v1(160.748,60.837) 161.151,60.435 C12.2 161.747,59.861 161.936,59.672 U1.35 ; J2.01 v2(164.389,15.106) ; J2.19 v2(164.389,26.536) ; v2(163.982,41.116) 164.016,41.149 Y1.4 ; v2(164.287,77.793) 164.313,77.768 C20.2@165.544,77.768 ; v2(164.897,51.072) 164.936,51.034 U1.8 ; C9.2@165.431,45.69 165.431,44.763 v2(165.773,44.42) ; v2(166.522,40.303) C18.2 ; C17.2 168.021,40.277 v2(168.046,40.252) ; U1.23 169.497,56.015 C14.2 171.412,56.8 v2(171.552,56.66) ; C16.2 v2(170.84,44.621) ; C15.2 v2(170.84,46.145) ; TP2.1 v1(174.142,4.235) ; v1(184.048,57.27) 184.058,57.28 J10.1 ; v2(186.944,15.106) J3.02
  F.Cu w0.293: C8.2 122.806,23.364 v1(122.834,23.336) ; v1(123.139,21.405) C5.2 ; v1(123.139,22.37) 123.165,22.396 C6.2
  F.Cu w0.508: U3.1 168.413,71.15 v2(168.453,71.189) ; v2(183.845,71.037) 183.87,71.062 J11.3 ; J11.4 190.831,71.062 v2(190.856,71.037)
  F.Cu w0.762: v1@142.342,6.114 v1(140.843,4.616) 139.141,2.914 v1(138.963,2.914) v1(134.569,2.914) v1(129.489,2.914) v1(124.46,2.914) v1(119.329,2.914) v1(113.309,2.914) 113.144,2.914 110.084,5.974 v1(110.084,6.114) v1(110.084,10.255) v1(110.084,15.385) v1(110.084,20.44) v1(110.084,25.571) v1(110.084,27.654) 110.084,27.857 111.15,28.924 v1(111.303,28.924) v1(116.815,28.924) v1(121.92,28.924) v1(127.025,28.924) v1(132.131,28.924) v1(137.16,28.924) v1(139.294,28.924) v1(140.779,27.438) v1(142.367,25.85) 142.392,25.825 v1(142.392,23.818) v1(142.392,21.735) ; v1@142.342,6.14 v1(142.342,6.318) v1(142.342,8.4) v1(142.342,10.255)
  In1.Cu w0.254: 175.311,83.153 175.311,86.531 J1.61 177.749,86.531 ; 177.775,86.505 177.8,86.48 177.8,83.102
  other v1: 133.858,60.877
I2C1-SCK: U1.45
I2C1-SDA: U1.46
I2C2-SCK: J1.43 J11.5 U1.32 U4.2 | length 104.2
  F.Cu w0.254: U4.2 130.662,61.127 130.099,61.69 130.099,63.315 132.08,65.296 132.08,70.935 132.08,72.459 ; J1.43 132.08,91.56 132.08,72.459 ; v1(133.993,70.554) 133.985,70.554 132.08,72.459 ; v1(135.247,69.31) 135.247,69.293 140.411,64.128 v1(152.451,64.128) ; v1(156.007,64.128) 160.172,64.128 ; U1.32 163.436,60.916 160.223,64.128 160.172,64.128 ; v1(179.578,73.628) 174.193,73.628 164.694,64.128 160.579,64.128 160.172,64.128 ; v1(183.642,73.628) 183.668,73.602 J11.5
  B.Cu w0.254: v1(133.993,70.554) 135.238,69.31 v1(135.247,69.31) ; v1(152.451,64.128) v1(156.007,64.128) ; v1(179.578,73.628) v1(183.642,73.628)
I2C2-SDA: J1.41 J11.6 U1.33 U4.1 | length 108
  F.Cu w0.254: U4.1 131.686,61.627 131.064,62.248 131.064,62.807 134.62,66.363 134.62,69.462 ; J1.41 134.62,91.56 134.62,69.462 ; v1(154.229,62.35) 140.462,62.35 134.62,68.192 134.62,69.462 ; v1(157.074,62.35) 160.985,62.35 162.936,60.4 U1.33 ; v1(162.306,65.093) 162.865,65.093 164.135,65.093 169.977,70.935 173.888,74.847 v1(179.578,74.847) ; v1(183.642,74.847) 187.567,74.847 J11.6
  B.Cu w0.254: v1(154.229,62.35) 154.24,62.361 156.018,62.361 ; v1(157.074,62.35) 157.062,62.361 156.018,62.361 ; v1(162.306,65.093) 158.75,65.093 156.018,62.361 ; v1(179.578,74.847) v1(183.642,74.847)
Net-(C2-Pad1): C2.1 L3.2 | length 1
  F.Cu w0.293: C2.1 L3.2
Net-(C2-Pad2): C2.2 L1.1 U2.2 | length 3.3
  F.Cu w0.293: U2.2 129.785,24.356 130.223,23.917 L1.1 131.27,23.945 C2.2
Net-(C3-Pad1): C3.1 L1.2 R1.2 U2.3 | length 3.5
  F.Cu w0.293: U2.3 130.168,24.856 C3.1 130.251,24.887 L1.2 131.435,25.08 R1.2
Net-(C7-Pad1): C7.1 L2.2 R2.2 U2.7 | length 3.2
  F.Cu w0.293: C7.1 123.977,24.354 R2.2 124.917,24.329 L2.2 125.935,24.356 U2.7
Net-(C7-Pad2): C7.2 C8.1 R3.1 | length 1.9
  F.Cu w0.293: R3.1 121.973,24.275 C8.1 122.044,24.301 C7.2
Net-(C20-Pad1): C20.1 FB1.1 U3.3 | length 3.7
  F.Cu w0.508: U3.3 166.675,77.349 167.094,77.768 167.094,79.279 FB1.1@167.106,79.292
Net-(D1-Pad1): D1.1 R4.2 | length 1.5
  F.Cu w0.254: D1.1 161.264,79.508 R4.2
Net-(D3-Pad2): D3.2 R9.1 | length 1.5
  F.Cu w0.254: D3.2 136.766,59.137 R9.1@138.252,59.137
NRST: J12.1
RESET-RX: J3.15 U1.39 | length 65.3
  F.Cu w0.254: U1.39 161.37,55.515 v2(161.696,55.841) ; v2(171.806,46.947) 171.816,46.958 194.31,46.958 196.494,44.773 196.494,24.961 195.529,23.996 J3.15
  B.Cu w0.254: v2(161.696,55.841) 162.109,55.841 167.488,50.463 170.739,47.212 171.541,47.212 v2(171.806,46.947)
RESET-TX: J5.15 U1.20 | length 53.1
  F.Cu w0.254: J5.15@150.737,46.119 152.07,46.119 153.518,44.672 153.518,40.1 157.124,36.493 173.025,36.493 v1(173.634,37.102) ; U1.20 173.623,54.515 173.803,54.515 v1(173.93,54.641)
  B.Cu w0.254: v1(173.634,37.102) 173.99,37.458 173.99,54.581 v1(173.93,54.641)
RX-TO-EM: J7.1 J8.1 | length 21.2
  F.Cu w0.293: J8.1 J7.1
SPI1-CSN-RX: J2.14 U1.19 | length 63.6
  F.Cu w0.254: J2.14 154.127,22.726 153.264,23.59 153.264,31.743 154.153,32.632 173.33,32.632 175.057,34.359 v1(175.057,35.731) ; U1.19 174.698,54.015 174.829,54.015 175.03,54.015 v1(175.158,54.142)
  B.Cu w0.254: v1(175.057,35.731) 175.057,38.728 175.057,39.896 175.057,54.041 v1(175.158,54.142)
SPI1-CSN-TX: J4.14 U1.41 | length 60.1
  F.Cu w0.254: v1(112.065,49.447) 112.065,52.292 114.288,54.515 U1.41 ; v1(114.503,44.875) 114.529,44.849 J4.14
  B.Cu w0.254: v1(112.065,49.447) 112.065,45.992 113.182,44.875 v1(114.503,44.875)
SPI1-MISO: J2.20 J4.20 U1.16 | length 123
  F.Cu w0.254: J4.20 113.106,48.659 112.065,47.618 112.065,34.359 112.065,32.073 112.979,31.159 151.74,31.159 v1(152.146,31.159) ; v1(155.55,31.159) 158.039,31.159 ; J2.20 156.82,26.536 156.261,27.095 156.261,30.06 157.36,31.159 158.039,31.159 ; U1.16 176.71,52.515 v1(176.835,52.639) ; 175.26,31.311 175.641,31.692 ; v1(176.835,35.731) 176.835,32.886 175.641,31.692 ; 158.039,31.159 175.108,31.159 175.641,31.692
  B.Cu w0.254: v1(152.146,31.159) v1(155.55,31.159) ; v1(176.835,35.731) 176.835,38.728 176.835,39.388 v1(176.835,52.639)
SPI1-MOSI: J2.18 J4.18 U1.17 | length 119.7
  F.Cu w0.254: J4.18 113.767,47.389 112.878,46.5 112.878,33.038 113.944,31.972 v1(152.146,31.972) ; v1(154.432,31.972) 155.346,31.972 ; J2.18 155.397,25.266 154.534,26.13 154.534,31.159 155.346,31.972 ; U1.17 175.577,53.015 v1(175.87,53.308) ; v1(175.87,35.731) 175.87,33.597 174.244,31.972 155.346,31.972
  B.Cu w0.254: v1(152.146,31.972) v1(154.432,31.972) ; v1(175.87,35.731) 175.87,38.741 v1(175.87,53.308)
SPI1-SCLK: J2.16 J4.16 U1.15 | length 122.2
  F.Cu w0.25: v1(156.616,24.047) 158.724,24.047 J2.16 ; v1(157.582,29.838) 175.717,29.838 177.902,32.022 v1(177.902,35.731) ; U1.15 177.502,52.015 177.775,52.015 v1(177.902,52.141)
  F.Cu w0.254: v1(113.69,30.532) 113.69,30.143 113.843,29.99 151.994,29.99 v1(152.146,29.838) ; v1(113.69,33.14) 113.69,33.699 113.69,42.64 113.69,45.383 114.427,46.119 J4.16
  B.Cu w0.25: 156.21,29.787 155.448,29.025 155.448,24.809 156.21,24.047 v1(156.616,24.047) ; 156.261,29.838 v1(157.582,29.838) ; v1(177.902,35.731) 177.902,38.728 v1(177.902,52.141)
  B.Cu w0.254: v1(113.69,30.532) v1(113.69,33.14) ; v1(152.146,29.838) 156.159,29.838
SPI2-CE: J10.2 U1.43 | length 65.6
  F.Cu w0.254: U1.43 156.062,53.515 155.245,52.698 155.245,44.468 160.426,39.287 186.334,39.287 188.773,41.725 v1(188.773,43.402) ; v1(188.773,53.257) J10.2
  B.Cu w0.254: v1(188.773,43.402) v1(188.773,53.257)
SPI2-CSN: J10.7 U1.42 | length 86.1
  F.Cu w0.254: U1.42 155.393,54.015 154.127,52.749 154.127,44.316 160.02,38.423 187.858,38.423 191.262,41.827 v1(191.262,43.402) ; J10.7 186.233,65.754 186.69,66.211 186.995,66.516 189.433,66.516 190.195,66.516 191.262,65.449 v1(191.262,53.257)
  B.Cu w0.254: v1(191.262,43.402) v1(191.262,53.257)
SPI2-IRQ: J10.5 U1.26 | length 22.6
  F.Cu w0.254: U1.26 166.436,59.571 169.225,62.36 J10.5
SPI2-MISO: J10.4 U1.27 | length 25.8
  F.Cu w0.254: U1.27 165.936,59.957 v1(166.218,60.239) ; v1(168.743,60.993) 168.748,60.997 187.596,60.997 J10.4
  B.Cu w0.254: v1(166.218,60.239) 166.241,60.239 166.98,60.978 168.729,60.978 v1(168.743,60.993)
SPI2-MOSI: J10.6 U1.28 | length 27.6
  F.Cu w0.254: U1.28 165.436,60.344 168.712,63.62 187.513,63.62 J10.6
SPI2-SCLK: J10.3 U1.21 | length 19.9
  F.Cu w0.25: U1.21 173.283,55.015 178.089,59.82 J10.3
SW6-5V: C19.1 FB1.2 J1.67 J11.2 MAX4372F1.1 | length 97.8
  F.Cu w0.508: MAX4372F1.1 157.842,76.162 C19.1 157.491,77.21 157.491,80.04 158.242,80.79 165.608,80.79 167.694,82.876 ; FB1.2@165.531,79.292 165.506,79.317 165.506,80.689 167.694,82.876 ; J1.67 167.694,86.534 167.694,82.876
  B.Cu w0.508: J1.67 170.18,89.02 170.18,94.456 172.973,97.25 194.31,97.25 198.577,92.982 198.577,71.646 195.453,68.522 J11.2
SWCLK: J12.8 U1.37 | length 67.8
  F.Cu w0.254: J12.8 116.301,73.546 112.979,70.224 112.979,58.692 115.164,56.508 131.406,56.508 131.413,56.515 U1.37
SWDIO: J12.10 U1.34 | length 70.5
  F.Cu w0.254: J12.10 115.336,71.006 114.148,69.818 114.148,59.048 115.214,57.981 115.875,57.321 147.98,57.321 v1(148.082,57.321) ; v1(156.882,61.498) 160.974,61.498 161.442,61.029 162.436,60.036 U1.34
  B.Cu w0.254: v1(148.082,57.321) 150.978,57.321 155.143,61.486 156.87,61.486 v1(156.882,61.498)
SYS-GPIO1: J11.10 U1.10 | length 70.7
  F.Cu w0.254: U1.10 165.936,48.51 166.672,47.774 192.789,47.774 193.091,48.075 196.24,51.225 196.24,59.81 198.679,62.248 198.679,77.438 197.435,78.682 v1(197.409,78.708)
  B.Cu w0.254: J11.10 197.383,78.682 v1(197.409,78.708)
SYS-GPIO2: J11.7 U1.11 | length 70.6
  F.Cu w0.254: U1.11 166.436,48.67 166.878,48.228 169.875,48.228 192.583,48.228 195.786,51.431 195.786,51.784 195.786,59.998 197.647,61.858 198.225,62.436 198.225,72.408 198.225,76.425 197.331,77.319 197.324,77.319 v1(197.307,77.336)
  B.Cu w0.254: J11.7 187.466,77.336 v1(197.307,77.336)
SYS-GPIO3: J11.8 U1.12 | length 64.4
  F.Cu w0.254: U1.12 166.936,49.186 167.44,48.682 192.376,48.682 195.332,51.638 195.332,60.186 197.771,62.625 197.771,74.694 197.771,75.704 v1(197.358,76.117)
  B.Cu w0.254: J11.8 197.333,76.142 v1(197.358,76.117)
SYS-GPIO4: J11.9 U1.40 | length 80.3
  F.Cu w0.254: U1.40 162.936,55.015 168.815,49.136 192.188,49.136 194.878,51.826 194.878,60.374 197.317,62.813 197.317,72.815 197.317,74.725 v1(197.144,74.898)
  B.Cu w0.254: J11.9 184.988,78.682 184.455,78.149 184.455,75.406 184.963,74.898 v1(197.144,74.898)
TEMP-ALERT: U1.25 U4.3 | length 41.6
  F.Cu w0.254: U4.3 131.248,60.627 130.843,60.222 130.843,58.626 131.335,58.134 159.207,58.134 159.766,58.134 161.08,56.82 161.08,56.814 165.607,56.814 165.913,56.508 166.624,56.508 166.929,56.813 166.929,57.938 U1.25
unconnected-(H1-Pad1): H1.1
unconnected-(H2-Pad1): H2.1
unconnected-(H3-Pad1): H3.1
unconnected-(H4-Pad1): H4.1
unconnected-(J1-Pad5): J1.5
unconnected-(J1-Pad6): J1.6
unconnected-(J1-Pad7): J1.7
unconnected-(J1-Pad8): J1.8
unconnected-(J1-Pad9): J1.9
unconnected-(J1-Pad10): J1.10
unconnected-(J1-Pad11): J1.11
unconnected-(J1-Pad12): J1.12
unconnected-(J1-Pad13): J1.13
unconnected-(J1-Pad14): J1.14
unconnected-(J1-Pad15): J1.15
unconnected-(J1-Pad16): J1.16
unconnected-(J1-Pad17): J1.17
unconnected-(J1-Pad18): J1.18
unconnected-(J1-Pad19): J1.19
unconnected-(J1-Pad20): J1.20
unconnected-(J1-Pad21): J1.21
unconnected-(J1-Pad22): J1.22
unconnected-(J1-Pad23): J1.23
unconnected-(J1-Pad24): J1.24
unconnected-(J1-Pad25): J1.25
unconnected-(J1-Pad26): J1.26
unconnected-(J1-Pad27): J1.27
unconnected-(J1-Pad28): J1.28
unconnected-(J1-Pad29): J1.29
unconnected-(J1-Pad30): J1.30
unconnected-(J1-Pad31): J1.31
unconnected-(J1-Pad33): J1.33
unconnected-(J1-Pad34): J1.34
unconnected-(J1-Pad35): J1.35
unconnected-(J1-Pad36): J1.36
unconnected-(J1-Pad37): J1.37
unconnected-(J1-Pad38): J1.38
unconnected-(J1-Pad39): J1.39
unconnected-(J1-Pad40): J1.40
unconnected-(J1-Pad42): J1.42
unconnected-(J1-Pad44): J1.44
unconnected-(J1-Pad45): J1.45
unconnected-(J1-Pad46): J1.46
unconnected-(J1-Pad47): J1.47
unconnected-(J1-Pad48): J1.48
unconnected-(J1-Pad49): J1.49
unconnected-(J1-Pad50): J1.50
unconnected-(J1-Pad51): J1.51
unconnected-(J1-Pad52): J1.52
unconnected-(J1-Pad53): J1.53
unconnected-(J1-Pad54): J1.54
unconnected-(J1-Pad55): J1.55
unconnected-(J1-Pad56): J1.56
unconnected-(J1-Pad57): J1.57
unconnected-(J1-Pad58): J1.58
unconnected-(J1-Pad59): J1.59
unconnected-(J1-Pad60): J1.60
unconnected-(J1-Pad62): J1.62
unconnected-(J1-Pad63): J1.63
unconnected-(J1-Pad64): J1.64
unconnected-(J1-Pad65): J1.65
unconnected-(J1-Pad68): J1.68
unconnected-(J1-Pad70): J1.70
unconnected-(J1-Pad71): J1.71
unconnected-(J1-Pad75): J1.75
unconnected-(J1-Pad76): J1.76
unconnected-(J1-Pad77): J1.77
unconnected-(J1-Pad78): J1.78
unconnected-(J1-Pad79): J1.79
unconnected-(J1-Pad80): J1.80
unconnected-(J1-Pad83): J1.83
unconnected-(J1-Pad85): J1.85
unconnected-(J1-Pad86): J1.86
unconnected-(J1-Pad87): J1.87
unconnected-(J1-Pad88): J1.88
unconnected-(J1-Pad89): J1.89
unconnected-(J1-Pad90): J1.90
unconnected-(J1-Pad91): J1.91
unconnected-(J1-Pad92): J1.92
unconnected-(J1-Pad93): J1.93
unconnected-(J1-Pad94): J1.94
unconnected-(J1-Pad95): J1.95
unconnected-(J1-Pad96): J1.96
unconnected-(J1-Pad97): J1.97
unconnected-(J1-Pad98): J1.98
unconnected-(J1-Pad99): J1.99
unconnected-(J1-Pad100): J1.100
unconnected-(J1-Pad101): J1.101
unconnected-(J1-Pad102): J1.102
unconnected-(J1-Pad103): J1.103
unconnected-(J1-Pad104): J1.104
unconnected-(J2-Pad02): J2.02
unconnected-(J2-Pad03): J2.03
unconnected-(J2-Pad04): J2.04
unconnected-(J2-Pad05): J2.05
unconnected-(J2-Pad06): J2.06
unconnected-(J2-Pad07): J2.07
unconnected-(J2-Pad08): J2.08
unconnected-(J2-Pad09): J2.09
unconnected-(J2-Pad10): J2.10
unconnected-(J2-Pad11): J2.11
unconnected-(J2-Pad12): J2.12
unconnected-(J2-Pad13): J2.13
unconnected-(J2-Pad15): J2.15
unconnected-(J2-Pad17): J2.17
unconnected-(J3-Pad01): J3.01
unconnected-(J3-Pad03): J3.03
unconnected-(J3-Pad04): J3.04
unconnected-(J3-Pad05): J3.05
unconnected-(J3-Pad06): J3.06
unconnected-(J3-Pad08): J3.08
unconnected-(J3-Pad10): J3.10
unconnected-(J3-Pad11): J3.11
unconnected-(J3-Pad12): J3.12
unconnected-(J3-Pad13): J3.13
unconnected-(J3-Pad14): J3.14
unconnected-(J3-Pad16): J3.16
unconnected-(J3-Pad17): J3.17
unconnected-(J3-Pad18): J3.18
unconnected-(J3-Pad19): J3.19
unconnected-(J3-Pad20): J3.20
unconnected-(J4-Pad02): J4.02
unconnected-(J4-Pad03): J4.03
unconnected-(J4-Pad04): J4.04
unconnected-(J4-Pad05): J4.05
unconnected-(J4-Pad06): J4.06
unconnected-(J4-Pad07): J4.07
unconnected-(J4-Pad08): J4.08
unconnected-(J4-Pad09): J4.09
unconnected-(J4-Pad10): J4.10
unconnected-(J4-Pad11): J4.11
unconnected-(J4-Pad12): J4.12
unconnected-(J4-Pad13): J4.13
unconnected-(J4-Pad15): J4.15
unconnected-(J4-Pad17): J4.17
unconnected-(J5-Pad01): J5.01
unconnected-(J5-Pad03): J5.03
unconnected-(J5-Pad04): J5.04
unconnected-(J5-Pad05): J5.05
unconnected-(J5-Pad06): J5.06
unconnected-(J5-Pad08): J5.08
unconnected-(J5-Pad10): J5.10
unconnected-(J5-Pad11): J5.11
unconnected-(J5-Pad12): J5.12
unconnected-(J5-Pad13): J5.13
unconnected-(J5-Pad14): J5.14
unconnected-(J5-Pad16): J5.16
unconnected-(J5-Pad17): J5.17
unconnected-(J5-Pad18): J5.18
unconnected-(J5-Pad19): J5.19
unconnected-(J5-Pad20): J5.20
unconnected-(J12-Pad5): J12.5
unconnected-(J12-Pad6): J12.6
unconnected-(MAX4372F1-Pad2): MAX4372F1.2
unconnected-(MAX4372F1-Pad5): MAX4372F1.5
unconnected-(MAX4372F1-Pad7): MAX4372F1.7
unconnected-(U1-Pad2): U1.2
unconnected-(U1-Pad3): U1.3
unconnected-(U1-Pad4): U1.4
unconnected-(U1-Pad31): U1.31
unconnected-(U1-Pad38): U1.38
unconnected-(U2-Pad9): U2.9
VCC_3V3: C21.1 D1.2 MAX4372F1.8 R5.1 U3.2 | length 11.7
  F.Cu w0.254: D1.2 160.375,77.336 U3.2@160.375,73.45
  F.Cu w0.508: R5.1@156.419,68.882 156.54,69.003 MAX4372F1.8 157.741,71.939 C21.1 158.864,71.939 U3.2@160.375,73.45
XOSC_IN: C10.1 U1.5 Y1.3 | length 8.4
  F.Cu w0.25: C10.1 162.167,46.996 163.436,48.265 U1.5
  F.Cu w0.254: Y1.3 161.916,42.501 162.843,43.428 162.843,45.151 162.204,45.789 C10.1
XOSC_OUT: C9.1 U1.6 Y1.1 | length 5.7
  F.Cu w0.254: U1.6 163.936,46.111 C9.1 163.614,44.603 Y1.1
pads on no net: J2.Un1 J2.Un2 J3.Un1 J3.Un2 J4.Un1 J4.Un2 J5.Un1 J5.Un2 U2.1 U2.4 U2.5 U2.8

## Polygon pours and split planes (outlines as drawn)
GND on In1.Cu "In1.Cu-GND" (solid, remove dead copper, pour order 0): 200.381,1.949 109.144,1.974 109.195,98.901 109.195,99.231 200.66,99.434
+3V3 on In2.Cu "In2.Cu-+3V3" (solid, remove dead copper, pour order 1): 199.441,1.949 144.932,1.949 144.882,18.408 125.324,18.408 125.324,23.132 129.896,23.132 129.896,20.389 144.882,20.389 144.831,28.568 134.061,28.568 134.061,26.942 132.131,26.942 132.131,28.517 109.169,28.517 109.169,97.961 199.288,97.961

## Keep-outs
Edge.Cuts:
  lines w0.1: 109.22,7.105 ccw(c114.3,7.105) 114.3,2.025 ; 109.22,7.105 ccw(c114.3,7.105) 114.3,2.025 ; 109.22,7.105 109.22,38.428 ; 109.22,7.105 109.22,38.428 ; 109.22,38.428 cw(c110.363,38.428) 110.363,39.571 ; 109.22,38.428 cw(c110.363,38.428) 110.363,39.571 ; 109.22,61.588 ccw(c110.363,61.588) 110.363,60.445 ; 109.22,61.588 ccw(c110.363,61.588) 110.363,60.445 ; 109.22,61.588 109.22,92.83 ; 109.22,61.588 109.22,92.83 ; 109.22,92.83 cw(c114.3,92.83) 114.3,97.91 ; 109.22,92.83 cw(c114.3,92.83) 114.3,97.91 ; 110.363,39.571 ccw(c110.363,40.714) 111.506,40.714 ; 110.363,39.571 ccw(c110.363,40.714) 111.506,40.714 ; 110.363,60.445 cw(c110.363,59.302) 111.506,59.302 ; 110.363,60.445 cw(c110.363,59.302) 111.506,59.302 ; 111.506,40.714 111.506,59.302 ; 111.506,40.714 111.506,59.302 ; 114.3,2.025 143.764,2.025 ; 114.3,2.025 143.764,2.025 ; 114.3,97.91 144.318,97.91 ; 114.3,97.91 144.318,97.91 ; 143.764,2.025 ccw(c143.764,3.168) 144.907,3.168 ; 143.764,2.025 ccw(c143.764,3.168) 144.907,3.168 ; 144.318,97.91 cw(c144.318,96.767) 145.461,96.767 ; 144.318,97.91 cw(c144.318,96.767) 145.461,96.767 ; 144.907,3.168 cw(c145.923,3.168) 145.923,4.184 ; 144.907,3.168 cw(c145.923,3.168) 145.923,4.184 ; 145.461,96.767 ccw(c146.604,96.767) 146.604,95.624 ; 145.461,96.767 ccw(c146.604,96.767) 146.604,95.624 ; 145.923,4.184 164.973,4.184 ; 145.923,4.184 164.973,4.184 ; 146.604,95.624 164.592,95.624 ; 146.604,95.624 164.592,95.624 ; 164.592,95.624 ccw(c164.592,96.767) 165.735,96.767 ; 164.592,95.624 ccw(c164.592,96.767) 165.735,96.767 ; 164.973,4.184 cw(c164.973,3.168) 165.989,3.168 ; 164.973,4.184 cw(c164.973,3.168) 165.989,3.168 ; 165.735,96.767 cw(c166.878,96.767) 166.878,97.91 ; 165.735,96.767 cw(c166.878,96.767) 166.878,97.91 ; 165.989,3.168 ccw(c167.132,3.168) 167.132,2.025 ; 165.989,3.168 ccw(c167.132,3.168) 167.132,2.025 ; 166.878,97.91 194.31,97.91 ; 166.878,97.91 194.31,97.91 ; 167.132,2.025 194.31,2.025 ; 167.132,2.025 194.31,2.025 ; 194.31,2.025 ccw(c194.31,7.105) 199.39,7.105 ; 194.31,2.025 ccw(c194.31,7.105) 199.39,7.105 ; 194.31,97.91 cw(c194.31,92.83) 199.39,92.83 ; 194.31,97.91 cw(c194.31,92.83) 199.39,92.83 ; 197.104,40.506 ccw(c198.247,40.506) 198.247,39.363 ; 197.104,40.506 ccw(c198.247,40.506) 198.247,39.363 ; 197.104,40.506 197.104,59.048 ; 197.104,40.506 197.104,59.048 ; 197.104,59.048 cw(c198.247,59.048) 198.247,60.191 ; 197.104,59.048 cw(c198.247,59.048) 198.247,60.191 ; 198.247,39.363 cw(c198.247,38.22) 199.39,38.22 ; 198.247,39.363 cw(c198.247,38.22) 199.39,38.22 ; 198.247,60.191 ccw(c198.247,61.334) 199.39,61.334 ; 198.247,60.191 ccw(c198.247,61.334) 199.39,61.334 ; 199.39,7.105 199.39,38.22 ; 199.39,7.105 199.39,38.22 ; 199.39,61.334 199.39,92.83 ; 199.39,61.334 199.39,92.83

## Silkscreen, mask and mechanical layers (free items; w line width, h text height)
F.SilkS:
  circle w0.15: c186.944,95.37 r0.568
  text "SYSTEM / TEST" at 193.294,83.722 h1
  text "PROGRAM" at 119.807,68.212 h1
  text "RADIO / TEST" at 190.449,56.24 h1
  text "TRANSMITTER" at 124.997,34.735 h1
  text "TX" at 140.599,23.617 h1
  text "RX" at 140.598,14.524 h1
  text "RECEIVER" at 166.354,12.637 h1
  text "Plesiosaurus" at 121.353,7.607 h1
F.Mask:
  lines w0.762: 110.084,5.962 113.132,2.914 139.141,2.914 142.342,6.114 ; 110.084,6.013 110.084,27.857 111.15,28.924 139.294,28.924 142.392,25.825 142.392,21.735 ; 142.342,6.165 142.342,10.255
User.1:
  lines w0.15: 113.665,33.318 153.035,33.318 153.035,68.878 113.665,68.878 113.665,33.318 ; 155.968,11.177 195.338,11.177 195.338,46.737 155.968,46.737 155.968,11.177

## Dimensions
199.39,2.025 to 194.31,2.025 on F.Fab
199.39,2.025 to 199.39,7.105 on F.Fab
109.22,97.91 to 109.22,92.83 on F.Fab
109.22,97.91 to 199.39,97.91 on F.Fab
108.966,97.91 to 108.966,82.924 on F.Fab
109.22,97.91 to 118.11,97.91 on F.Fab
109.22,2.025 to 114.3,2.025 on F.Fab
199.39,97.91 to 199.39,82.924 on F.Fab
104.013,97.91 to 104.013,2.025 on F.Fab
109.22,97.91 to 191.77,97.91 on F.Fab
109.22,2.025 to 109.22,7.105 on F.Fab

## Text inside footprints (layer, text, board x,y; h text height)
J1: F.SilkS "H1" at 188.683,89.403 h1; F.SilkS "H2" at 188.622,84.295 h1
U4: F.Fab "*" at 137.114,60.353 h1; F.Fab "*" at 137.114,60.353 h1; Cmts.User "0.069in/1.753mm" at 131.753,56.54 h1; Cmts.User "0.061in/1.549mm" at 135.665,60.591 h1; Cmts.User "0.01in/0.254mm" at 136.35,61.341 h1; Cmts.User "0.032in/0.813mm" at 130.356,57.81 h1; Cmts.User "0.02in/0.5mm" at 127.763,61.091 h1; Cmts.User "0.11in/2.794mm" at 131.905,64.007 h1; Cmts.User "Copyright 2021 Accelerated Designs. All rights reserved." at 132.997,60.828 h0.13